# EAGLE board BTIR-v30 (EAGLE 5.10)
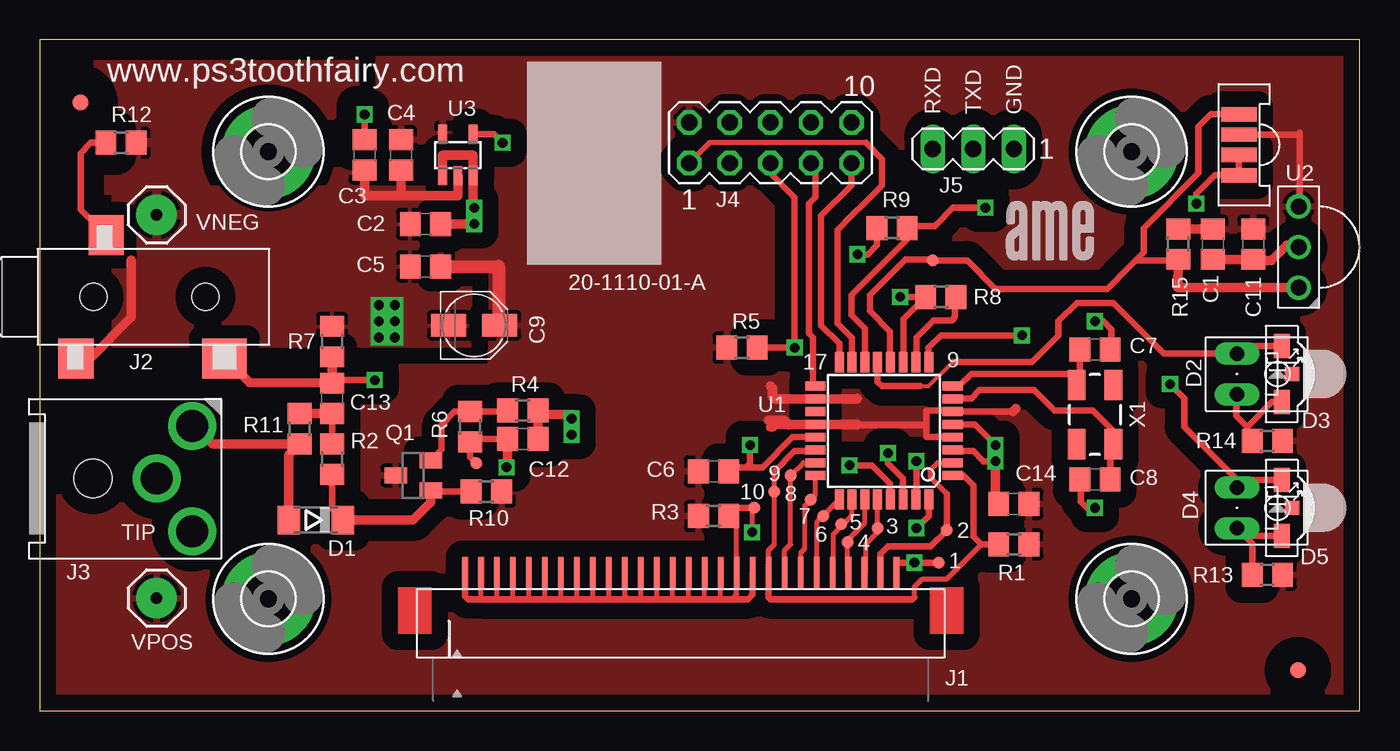
[diagram p0: board, top side]
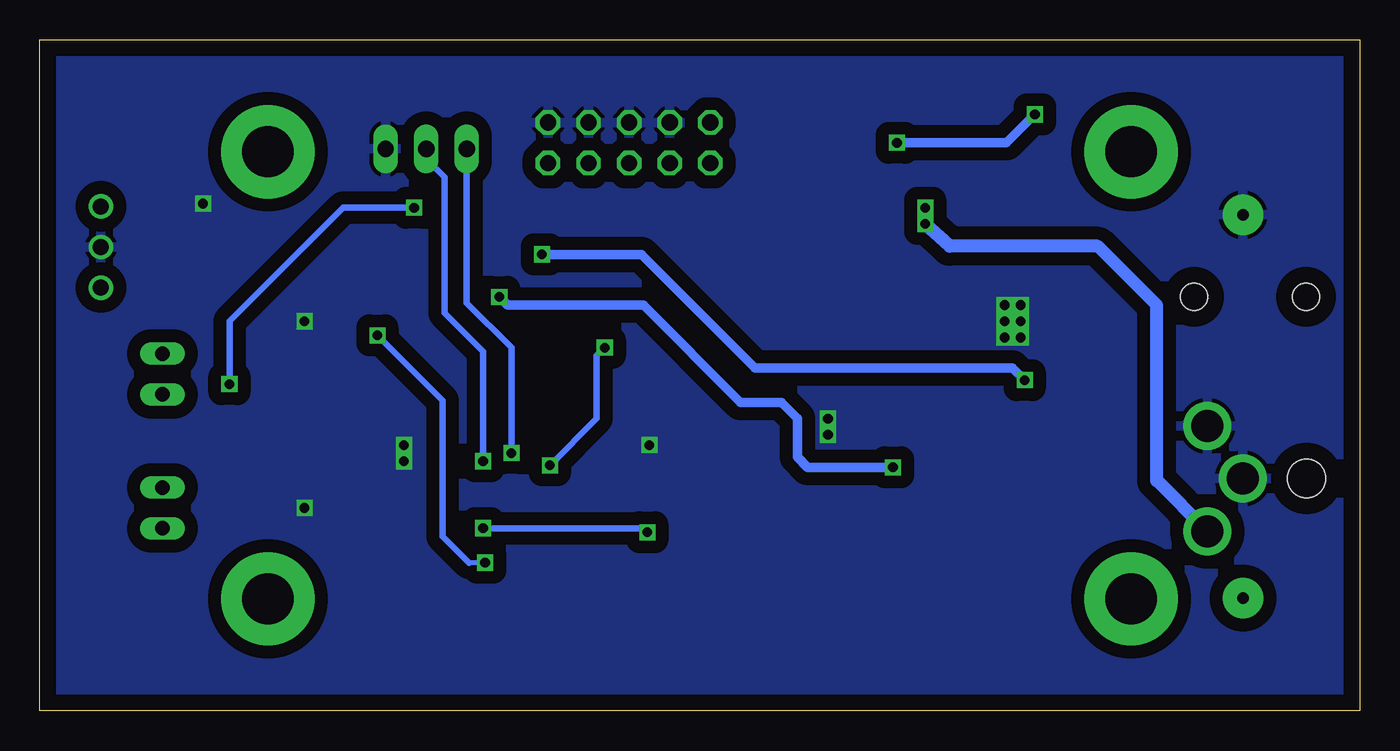
[diagram p1: board, bottom side, seen from below]

Size 82.6 x 42 mm. Coordinates in mm from the lower left corner, seen from the top.
Outline: 0,0 82.6,0 82.6,42 0,42 0,0
Copper layers (1*16): Top 0.035mm / dielectric 1.5mm / Bottom 0.035mm
Design rules "default": minimum track width 10mil, minimum drill 24mil, track to track 8mil, track to pad 8mil, pad to pad 8mil, via to via 8mil, smd to smd 8mil, copper to edge 40mil, drill to drill 8mil, minimum pad ring 10mil, minimum via ring 8mil, stop-mask expansion 4mil, vias tented up to drill 0mil, thermal gap 10mil

## Footprints (pad centres in the part's own frame; a part is rotated, then mirrored left to right if it is on the bottom)
C0805 = smd 1.3 x 1.5: 1 -0.95,0; 2 0.95,0
PANASONIC_B = smd 2.2 x 1.4: + 1.6,0; - -1.6,0
SOD80C = smd 1.4 x 1.8: A 1.7,0; C -1.7,0
WP934CB = drill 0.9 long: A -1.27,0; K 1.27,0
LUMEX_SML_LXR851 = smd 1.5 x 1: A 1.75,0; K -1.75,0 | smd 0.9 x 0.9: P$3 0,0.65
3,2-PAD = drill 3.2 pad 5.842 round: B3,2 0,0
52271-2879 = smd 0.35 x 2: 1 -30,2; 2 -29,2; 3 -28,2; 4 -27,2; 5 -26,2; 6 -25,2; 7 -24,2; 8 -23,2; 9 -22,2; 10 -21,2; 11 -20,2; 12 -19,2; 13 -18,2; 14 -17,2; 15 -16,2; 16 -15,2; 17 -14,2; 18 -13,2; 19 -12,2; 20 -11,2; 21 -10,2; 22 -9,2; 23 -8,2; 24 -7,2; 25 -6,2; 26 -5,2; 27 -4,2; 28 -3,2
SJ-3523-SMT = smd 2.5 x 2.2: 1 3.85,-4.6; 3 -3.85,-2.7 | smd 2.5 x 2.8: 2 3.85,4.7 | hole 1.7: 0,-3.5; 0,3.5
KOBICONN_163-021X-E = drill 2 round: BARREL_2 3,0; PIN_3 5.2,-3.3; SHUNT_1 5.2,3.3 | hole 2.4: -1,0
MA05-2 = drill 1.016 octagon: 1 -5.08,-1.27; 2 -5.08,1.27; 3 -2.54,-1.27; 4 -2.54,1.27; 5 0,-1.27; 6 0,1.27; 7 2.54,-1.27; 8 2.54,1.27; 9 5.08,-1.27; 10 5.08,1.27
MA03-1 = drill 1.016 long: 1 -2.54,0; 2 0,0; 3 2.54,0
SOT23 = smd 1 x 1.4: 1 -0.95,-1.1; 2 0.95,-1.1; 3 0,1.1
R0805 = smd 1.3 x 1.5: 1 -0.95,0; 2 0.95,0
PAD.03X.03 = smd 0.762 x 0.762: P$1 0,0
TQFP32-08 = smd 1.27 x 0.559: 1 -4.293,2.8; 2 -4.293,2; 3 -4.293,1.2; 4 -4.293,0.4; 5 -4.293,-0.4; 6 -4.293,-1.2; 7 -4.293,-2; 8 -4.293,-2.8; 17 4.293,-2.8; 18 4.293,-2; 19 4.293,-1.2; 20 4.293,-0.4; 21 4.293,0.4; 22 4.293,1.2; 23 4.293,2; 24 4.293,2.8 | smd 0.559 x 1.27: 9 -2.8,-4.293; 10 -2,-4.293; 11 -1.2,-4.293; 12 -0.4,-4.293; 13 0.4,-4.293; 14 1.2,-4.293; 15 2,-4.293; 16 2.8,-4.293; 25 2.8,4.293; 26 2,4.293; 27 1.2,4.293; 28 0.4,4.293; 29 -0.4,4.293; 30 -1.2,4.293; 31 -2,4.293; 32 -2.8,4.293
VISHAY_TSOP_IR_LEADED = drill 1.016 round: 1 -2.54,0; 2 0,0; 3 2.54,0
SOT23-5 = smd 0.55 x 1.2: 1 -0.95,-1.3; 2 0,-1.3; 3 0.95,-1.3; 4 0.95,1.3; 5 -0.95,1.3
VISHAY_TSOP361XX = smd 0.9 x 2.2: 1 -1.905,0; 2 -0.635,0; 3 0.635,0; 4 1.905,0
FIDUCIAL_1MM = smd 1 x 1: 1 0,0
MACHINE_PIN_LARGE_RING = drill 0.711 pad 2.54 round: P$1 0,0
CRYSTAL-SMD-5X3 = smd 1.9 x 1.1: 1 -1.85,-1.15; 2 1.85,-1.15; 3 1.85,1.15; 4 -1.85,1.15

## Placement (x,y rotation side)
C1  0.1uF  [C0805]  73.41,29.21 270 top
C2  1uF  [C0805]  24.13,30.48 180 top
C3  10nF  [C0805]  20.32,34.8 270 top
C4  0.1uF  [C0805]  22.61,34.8 270 top
C5  1uF  [C0805]  24.13,27.81 180 top
C6  0.1uF  [C0805]  42.16,14.99 0 top
C7  18pF  [C0805]  66.04,22.61 0 top
C8  18pF  [C0805]  66.04,14.48 0 top
C9  10uF  [PANASONIC_B]  27.18,24.13 0 top
C11  47pF  [C0805]  75.95,29.21 270 top
C12  2200pF  [C0805]  30.23,17.02 0 top
C13  1uF  [C0805]  18.29,19.56 270 top
C14  0.1uF  [C0805]  60.96,12.95 180 top
D1  PMLL4150  [SOD80C]  17.27,11.94 180 top
D2  WP934CB  [WP934CB]  74.93,21.08 90 top
D3  HSMS-C110  [LUMEX_SML_LXR851]  77.72,21.08 270 top
D4  WP934CB  [WP934CB]  74.93,12.7 90 top
D5  IR12-21C/TR8  [LUMEX_SML_LXR851]  77.72,12.7 270 top
H1  MOUNT-PAD-ROUND3.2  [3,2-PAD]  14.3,35 0 top
H2  MOUNT-PAD-ROUND3.2  [3,2-PAD]  14.3,7 0 top
H3  MOUNT-PAD-ROUND3.2  [3,2-PAD]  68.33,7 0 top
H4  MOUNT-PAD-ROUND3.2  [3,2-PAD]  68.33,35 0 top
J1  MOLEX_52271-2879REV  [52271-2879]  56.61,6.62 0 top
J2  SJ-3523-SMT  [SJ-3523-SMT]  6.85,25.92 270 top
J3  KOBICONN_163-021X-E  [KOBICONN_163-021X-E]  4.32,14.53 0 top
J4  [MA05-2]  45.72,35.56 0 top
J5  [MA03-1]  58.42,35.18 180 top
Q1  [SOT23]  23.37,14.73 90 top
R1  10K  [R0805]  60.96,10.41 180 top
R2  10K  [R0805]  18.29,15.75 270 top
R3  10K  [R0805]  42.16,12.19 0 top
R4  10K  [R0805]  30.23,18.8 180 top
R5  10K  [R0805]  43.94,22.73 0 top
R6  3900  [R0805]  26.92,17.78 270 top
R7  10K  [R0805]  18.29,23.11 90 top
R8  10K  [R0805]  56.39,25.91 180 top
R9  20  [R0805]  53.34,30.23 0 top
R10  10K  [R0805]  27.94,13.72 0 top
R11  10K  [R0805]  16.26,17.65 90 top
R12  0  [R0805]  5.08,35.56 0 top
R13  100  [R0805]  76.83,8.51 0 top
R14  100  [R0805]  76.83,16.89 0 top
R15  1K  [R0805]  71.25,29.21 90 top
TP1  TEST-POINT3  [PAD.03X.03]  45.97,13.72 0 top
TP2  TEST-POINT3  [PAD.03X.03]  44.7,12.7 0 top
TP3  TEST-POINT3  [PAD.03X.03]  56.26,9.27 180 top
TP4  TEST-POINT3  [PAD.03X.03]  56.77,11.3 180 top
TP5  TEST-POINT3  [PAD.03X.03]  52.45,11.43 180 top
TP6  TEST-POINT3  [PAD.03X.03]  50.55,10.54 180 top
TP7  TEST-POINT3  [PAD.03X.03]  50.16,11.68 180 top
TP8  TEST-POINT3  [PAD.03X.03]  49.02,12.19 180 top
TP9  TEST-POINT3  [PAD.03X.03]  48.26,13.21 180 top
TP10  TEST-POINT3  [PAD.03X.03]  46.99,14.73 180 top
TP11  TEST-POINT3  [PAD.03X.03]  27.3,15.49 0 top
TP12  TEST-POINT3  [PAD.03X.03]  55.88,28.19 0 top
U1  ATMEGA48  [TQFP32-08]  52.83,17.53 180 top
U2  TSOP34836  [VISHAY_TSOP_IR_LEADED]  78.79,29.03 90 top
U3  MIC5205  [SOT23-5]  26.16,34.8 0 top
U4  TSOP361XXSMT  [VISHAY_TSOP361XX]  75.06,35.43 90 top
U$2  [AME_LOGO]  60.45,28.19 0 top
U$3  FIDUCIAL  [FIDUCIAL_1MM]  2.54,38.1 0 top
U$4  FIDUCIAL  [FIDUCIAL_1MM]  78.74,2.54 0 top
VNEG  M01PTH  [MACHINE_PIN_LARGE_RING]  7.3,31.05 0 top
VPOS  M01PTH  [MACHINE_PIN_LARGE_RING]  7.3,7.05 0 top
X1  [CRYSTAL-SMD-5X3]  66.04,18.54 270 top

## Library data of the parts
C1-C9 C11-C14 R1-R15 = rcl
D1 = diode; NOSTUFF: 0
D2-D5 J1 J3 U1-U4 VNEG VPOS = ayman
H1-H4 = holes
J2 = con-cuistack
J4 J5 = con-lstb
Q1 = SparkFunEagle-6-6-07
TP1-TP12 X1 = SparkFun
U$2 = ayman-graphics
U$3 U$4 = adafruit

## Nets
!RESET: J4.5 R5.2 U1.29
BASEIN: C12.1 R6.2 R8.2 TP11.P$1 U1.11
GND: C1.2 C2.2 C3.2 C4.2 C5.2 C6.2 C7.2 C8.1 C9.- C11.2 C12.2 C14.2 D1.A J2.1 J3.BARREL_2 J3.SHUNT_1 J4.4 J4.6 J4.8 J4.10 J5.1 R4.1 R7.2 R11.1 R12.2 U1.3 U1.5 U1.21 U2.2 U3.2 U4.1 U4.2 VNEG.P$1
IR_SENSE: R15.1 TP12.P$1 U1.12 U2.1 U4.4
IRDRIVE: D4.K D5.K R9.2 U1.14
LED: D2.K D3.K U1.13
MISO: J4.9 U1.16
MOSI: J4.1 U1.15
N$1: C3.1 U3.4
N$2: C8.2 U1.7 X1.3
N$3: D2.A D3.A R14.1
N$4: D1.C Q1.1 R2.2 R10.1
N$5: C13.1 J2.2 R7.1 R9.1
N$6: Q1.2 R4.2 R6.1
N$7: C13.2 R2.1 R11.2
N$8: C7.1 U1.8 X1.1
N$9: J5.3 U1.30
N$10: J5.2 U1.31
N$11: J2.3 R12.1
N$12: D4.A D5.A R13.1
PULLUP: R8.1 U1.10
SCAN9: J1.20 R1.2 TP1.P$1 U1.1 U1.22
SCAN10TO28: J1.1 J1.2 J1.3 J1.4 J1.5 J1.6 J1.7 J1.8 J1.9 J1.10 J1.11 J1.12 J1.13 J1.14 J1.15 J1.16 J1.17 J1.18 J1.19 R3.2 TP2.P$1 U1.32
SCK: J4.7 U1.17
SENSE1: J1.28 TP3.P$1 U1.9
SENSE2: J1.27 TP4.P$1 U1.2
SENSE3: J1.26 TP5.P$1 U1.28
SENSE4: J1.25 TP6.P$1 U1.27
SENSE5: J1.24 TP7.P$1 U1.26
SENSE6: J1.23 TP8.P$1 U1.25
SENSE7: J1.22 TP9.P$1 U1.24
SENSE8: J1.21 TP10.P$1 U1.23
VCC: C1.1 C4.1 C5.1 C6.1 C9.+ C11.1 C14.1 J4.2 Q1.3 R1.1 R3.1 R5.1 R10.2 R13.2 R14.2 R15.2 U1.4 U1.6 U1.18 U1.20 U2.3 U3.5 U4.3 VPOS.P$1
VIN: C2.1 J3.PIN_3 U3.1 U3.3

## Tracks (layer width: path | path; a pad name or v marks a point on that pad's centre or on a via)
!RESET  (via drill 0.6)
  Top 0.305: U1.29 53.21,13.25
  Top 0.406: J4.5 45.72,33.66 47.24,32.13 v47.24,22.73 R5.2 | 53.21,13.25 53.21,14.22 52.07,15.37 v50.67,15.37
  Bottom 0.406: v50.67,15.37 47.75,18.29 47.75,22.23 v47.24,22.73
BASEIN  (via drill 0.6)
  Top 0.406: U1.11 54.04,24.51 R8.2 v53.85,25.91 | TP11.P$1 26.92,15.88 R6.2 27.11,17.02 C12.1 29.28,16.44
  Top 0.61: 29.28,16.44 29.28,15.31 v29.21,15.24
  Bottom 0.61: v53.85,25.91 53.34,25.4 44.83,25.4 38.73,19.3 36.2,19.3 35.18,18.29 35.18,15.88 34.54,15.24 v29.21,15.24
GND  (via drill 0.6)
  Top 0.406: 78.79,29.01 U2.2 78.67,29.15 | U1.21 47.1,17.13 45.21,15.24 44.2,15.24 | C6.2 43.37,15.24 44.2,15.24 | U1.5 58.53,17.93 v59.82,16.64 | v59.82,15.62 59.05,15.62 58.42,16.26 57.2,16.26 U1.3 | v44.45,16.64 44.45,15.49 44.2,15.24 | v66.04,24.38 66.55,24.38 67.06,23.88 67.06,22.67 C7.2 | v66.04,12.7 65.53,12.7 65.15,13.08 65.15,14.42 C8.1 | U4.2 U4.1 73.53,33.53 72.39,32.38 v72.39,31.75
  Top 0.61: J2.1 3.14,22.07 5.71,24.64 5.71,28.2 | VNEG.P$1 7.68,31.05 | C12.2 R4.1 31.43,18.54 33.4,18.54 33.27,18.41 v33.27,17.27 | 9.57,17.78 J3.SHUNT_1 9.68,17.83 10.81,16.7 R11.1 15.57,16.02 D1.A | 78.67,29.15 78.04,29.15 77.09,28.19 76.01,28.19 C11.2 C1.2 | C14.2 59.82,13.02 v59.82,16.64 | U3.2 26.16,32.26 22.61,32.26 | 22.61,32.26 C4.2 | C3.2 20.32,32.26 22.61,32.26
  Top 0.813: v59.82,15.62 v59.82,16.64
  other vias: 33.27,18.29 21.21,25.4 21.21,24.38 21.21,23.37 22.23,25.4 22.23,24.38 22.23,23.37
  pour Bottom (isolate 0.813): 0,41.91 0,0 82.55,0 82.55,41.91
  pour Top (isolate 1.27): 1.78,41.4 19.68,41.4 19.68,27.81 1.78,27.81
  pour Top (isolate 0.813): 4.57,32.77 4.57,22.86 26.92,22.86 27.05,32.77
IR_SENSE
  Top 0.406: 53.21,21.8 53.21,21.34 | U1.12 53.21,21.8 | 53.21,21.8 53.21,23.75 51.94,25.02 51.94,26.04 54.17,28.26 55.81,28.26 TP12.P$1 58.04,28.19 59.82,26.42 66.8,26.42 68.26,27.88 68.58,28.19 | 68.58,28.19 70.8,28.19 R15.1 | U4.4 73.28,37.34 72.52,36.58 72.52,33.66 69.09,30.23 69.09,28.7 68.58,28.19
  Top 0.61: U2.1 71.24,26.49 R15.1
IRDRIVE  (via drill 0.6)
  Top 0.406: U1.14 51.63,23.93 50.8,24.77 50.8,26.04 54.36,29.59 54.36,30.16 R9.2 54.42,30.35 56.01,30.35 57.15,31.5 v59.18,31.5 | D5.K 75.41,14.45 D4.K 74.93,14.48 71.63,17.78 71.63,19.56 v70.74,20.45
  Bottom 0.406: v70.74,20.45 70.74,24.38 63.63,31.5 v59.18,31.5
LED
  Top 0.254: 55.12,20.32 55.63,20.32 57.15,21.84
  Top 0.406: U1.13 52.43,20.59 52.7,20.32 55.12,20.32 | 57.15,21.84 62.1,21.84 63.75,23.5 63.75,24.38 64.9,25.53 67.18,25.53 70.36,22.35 D2.K 75.21,22.7 75.34,22.83 D3.K
MISO
  Top 0.406: J4.9 50.8,32.89 48.9,30.99 48.9,24.13 50.03,22.99 U1.16
MOSI
  Top 0.305: 51.69,35.56 41.91,35.56 J4.1
  Top 0.406: 51.69,35.56 52.7,34.54 52.7,32.89 51.56,31.75 50.83,31.02 49.91,30.1 49.91,24.26 50.83,23.34 U1.15
N$1  (via drill 0.61)
  Top 0.406: C3.1 v20.32,37.34 | U3.4 28.42,36.1 v28.96,35.56
  Bottom 0.61: v28.96,35.56 22.1,35.56 v20.32,37.34
N$2
  Top 0.406: U1.7 57.16,19.56 58.29,19.56 58.8,20.07 62.23,20.07 63.5,18.8 65.91,18.8 67.19,17.52 X1.3 66.99,16.49 C8.2
N$3
  Top 0.406: 75.56,17.78 74.88,18.47 D2.A 74.9,19.81 | 75.56,17.78 75.56,16.32 R14.1 | 75.56,17.78 77.12,19.33 D3.A
N$4
  Top 0.406: R2.2 18.29,12.62 D1.C | R10.1 24.53,13.72 Q1.1
  Top 0.61: Q1.1 24.47,13.04 23.37,11.94 D1.C
N$5  (via drill 0.6)
  Top 0.406: R9.1 52.39,29.15 51.82,28.57 v51.18,28.57 | v20.95,20.7 18.48,20.7 C13.1
  Top 0.61: J2.2 13.11,20.54 C13.1 R7.1
  Bottom 0.61: v51.18,28.57 44.96,28.57 37.85,21.46 21.72,21.46 v20.95,20.7
N$6
  Top 0.406: 24.07,15.68 Q1.2 25.15,16.36 25.15,17.91 25.97,18.73 R6.1 29.21,18.73 R4.2
N$7
  Top 0.406: C13.2 R2.1
  Top 0.61: R11.2 C13.2
N$8
  Top 0.406: U1.8 57.54,20.33 58.29,21.08 64.96,21.08 X1.1 65.09,20.59 C7.1
N$9  (via drill 0.6)
  Top 0.406: U1.30 54.03,14.55 53.09,15.49 v53.09,16.13
  Bottom 0.406: v53.09,16.13 53.09,22.73 55.88,25.53 J5.3
N$10  (via drill 0.6)
  Top 0.406: v54.86,15.62 54.86,13.27 U1.31
  Bottom 0.406: J5.2 58.42,34.54 57.28,33.4 57.28,24.89 54.86,22.48 v54.86,15.62
N$11
  Top 0.406: 4.13,29.77 J2.3 2.54,31.38 2.54,34.92 3.17,35.56 R12.1
N$12
  Top 0.406: D5.A 75.41,10.95 D4.A 75.89,10.47 R13.1
PULLUP
  Top 0.305: U1.10 54.86,21.85
  Top 0.406: 54.86,21.85 54.86,23.37 55.94,24.45 57.08,24.45 57.28,24.64 57.28,25.85 R8.1
SCAN9
  Top 0.305: 45.61,9.14 J1.20 | 45.59,9.13 45.61,9.14 | 58.93,10.41 56.77,8.26 55.24,8.26 54.74,7.75 54.74,7.11 | 45.97,14.99 TP1.P$1 45.97,10.41 45.59,10.03 45.59,9.16 45.61,9.14
  Top 0.406: 45.97,14.99 47.24,16.26 48.47,16.26 U1.22 | R1.2 58.93,10.41 58.42,10.92 58.42,14.1 57.79,14.73 U1.1 | 45.59,9.13 45.59,7.11 45.72,6.99 54.61,6.99 54.74,7.11
SCAN10TO28  (via drill 0.6)
  Top 0.305: J1.2 27.61,7.06 27.69,6.99 | J1.3 28.61,7.02 28.57,6.99 | J1.4 29.61,7.09 29.72,6.99 | J1.5 30.61,6.99 | J1.6 31.61,7.12 31.75,6.99 | J1.7 32.61,7.01 32.64,6.99 | J1.8 33.61,7.07 33.53,6.99 | J1.9 34.61,7.05 34.54,6.99 | J1.10 35.61,7.04 35.56,6.99 | J1.12 37.61,7.09 37.72,6.99 | J1.13 38.61,7.11 38.73,6.99 | J1.14 39.61,7.13 39.75,6.99 | J1.15 40.61,7.14 40.77,6.99 | J1.16 41.61,7.03 41.66,6.99 | J1.17 42.61,7.05 42.67,6.99 | 43.31,6.99 43.61,7.29 J1.18 43.61,11.7 R3.2 43.43,12.19 | J1.11 36.61,7.21 36.83,6.99 | v44.58,11.18 44.58,12.83 TP2.P$1
  Top 0.406: TP2.P$1 43.62,12.7 R3.2 | J1.1 26.61,7.17 26.8,6.99 27.69,6.99 28.57,6.99 29.72,6.99 30.61,6.99 31.75,6.99 32.64,6.99 33.53,6.99 34.54,6.99 35.56,6.99 36.83,6.99 37.72,6.99 38.73,6.99 39.75,6.99 40.77,6.99 41.66,6.99 42.67,6.99 43.31,6.99 44.32,6.99 44.61,7.27 J1.19 | U1.32 55.63,12.2 v54.86,11.43
  Bottom 0.305: v44.58,11.18 44.83,11.43
  Bottom 0.406: 44.83,11.43 v54.86,11.43
SCK
  Top 0.305: 48.54,34.01 J4.7
  Top 0.406: 48.54,34.01 48.54,32.16 48.13,31.75 48.13,23.62 48.39,23.37 48.39,20.48 U1.17
SENSE1  (via drill 0.6)
  Top 0.305: U1.9 | 53.72,9.27 53.59,9.27 53.59,8.64 J1.28
  Top 0.406: v61.47,23.5 56.39,23.5 55.63,22.73 U1.9 | TP3.P$1 v54.74,9.27 53.72,9.27
  Bottom 0.305: v54.74,9.27 55.75,9.27
  Bottom 0.406: 55.75,9.27 57.4,10.92 57.4,19.43 v61.47,23.5
SENSE2
  Top 0.305: U1.2 56.17,15.53 55.75,15.11 55.75,14.61 56.77,13.59
  Top 0.406: J1.27 52.61,9.81 53.09,10.29 55.75,10.29 TP4.P$1 56.77,13.59
SENSE3
  Top 0.254: 52.43,11.43 TP5.P$1
  Top 0.305: U1.28 52.43,11.43 52.43,11.16 51.69,10.41 51.69,8.7 J1.26
SENSE4
  Top 0.305: U1.27 51.63,11.75 50.55,10.67 TP6.P$1 50.55,8.68 J1.25
SENSE5
  Top 0.254: 50.16,11.56 TP7.P$1
  Top 0.305: U1.26 50.83,12.22 50.16,11.56 49.66,11.05 49.66,8.67 J1.24
SENSE6
  Top 0.254: TP8.P$1 49.07,12.24 49.07,12.27
  Top 0.305: J1.23 48.64,8.65 48.64,11.84 49.07,12.27 U1.25
SENSE7
  Top 0.305: U1.24 48.54,13.49 TP9.P$1 47.88,12.83 47.88,10.16 47.62,9.91 47.62,8.63 J1.22
SENSE8
  Top 0.305: U1.23 47.78,15.53 TP10.P$1 46.99,10.41 46.61,10.03 J1.21
VCC
  Top 0.254: U1.20 48.26,17.78
  Top 0.406: 46.26,19.53 46.23,19.56 46.1,19.56 | U1.18 48.57,19.56 | 46.86,17.91 48.64,17.91 | U1.4 55.52,17.13 55.5,17.14 55.5,17.78 | 55.5,17.78 55.5,18.8 57.05,18.8 U1.6 60.89,18.73 | 60.96,18.8 60.83,18.67 | 51.18,17.91 55.37,17.91 55.5,17.78 | 73.53,30.29 C1.1 73.28,30.29 | U4.3 78.74,36.07 78.87,36.2 78.87,31.65 U2.3
  Top 0.61: 46.86,17.91 46.61,18.16 45.59,18.16 45.72,18.03 46.1,18.03 45.85,17.78 45.72,17.78 45.87,17.93 U1.20 51.16,17.93 51.18,17.91 | 45.72,20.32 45.85,20.19 45.85,19.68 46.01,19.53 U1.18 51.15,19.53 51.18,19.56 | 60.89,18.73 60.96,18.8 61.09,18.92 | R15.2 C1.1
  Top 0.813: C5.1 28.7,27.81 28.7,24.21 C9.+
  pour Top (isolate 1.016, rank 2): 0,42.16 0,0 82.55,0 82.55,42.16
VIN  (via drill 0.6)
  Top 0.61: v27.18,30.48 27.11,30.55 27.1,30.55 27.1,34.8 | v27.18,30.48 C2.1 | v27.18,30.48 v27.18,31.5 | 27.1,34.8 25.21,34.8 U3.1 | 27.1,34.8 27.11,34.8 U3.3
  Bottom 0.813: 9.46,11.23 J3.PIN_3 12.7,14.41 12.7,25.4 16.38,29.08 25.65,29.08 v27.18,30.48 v27.18,31.5

## Text on the board
tPlace: www.ps3toothfairy.com | RXD | TXD | GND | 20-1110-01-A | 17 | 9 | 9 | 10 | 8 | 7 | TIP | 6 | 5 | 3 | 2 | 4 | 1
dxf: END PANEL
tDocu: 1 | 28 | 1